# Altium PCB TX_Board.PcbDoc (part 4 of 5)
Units mm, origin at the board's own origin, x right, y up, seen from the top; angles counter-clockwise.
Board outline 69 x 69 mm, 4 copper layers (Top Layer, Int1 (GND), Int2 (GND), Bottom Layer), stack 1.591 mm thick; 102 components, 48 nets, 289 pads, 82 vias.
Unrouted connection lines stored in the file: 40.
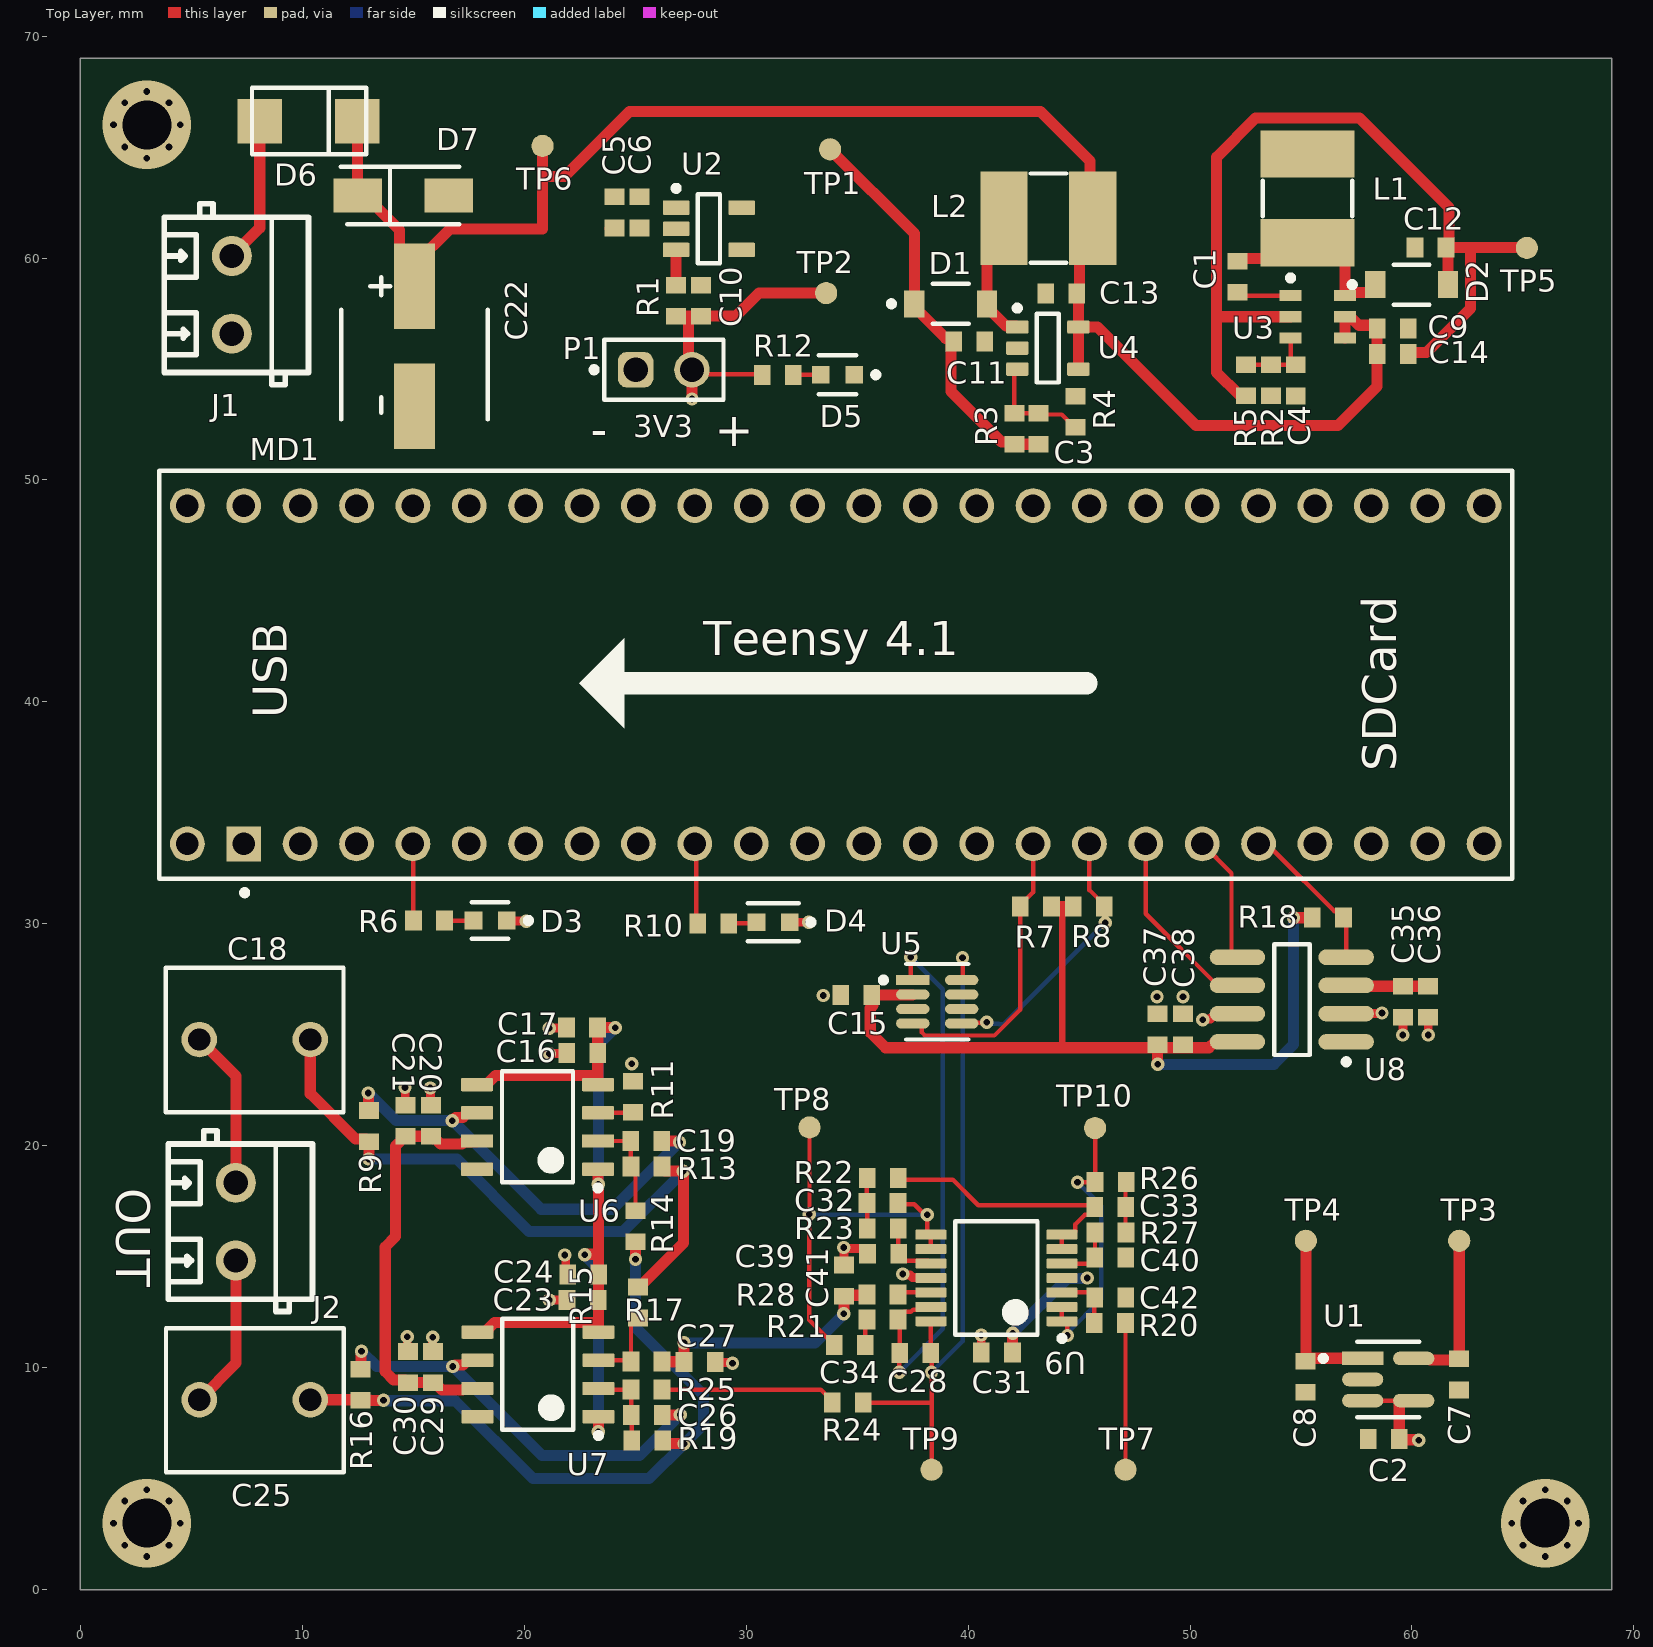
[diagram p0: Top Layer view]

## Part data (continued)
R17 R25: library part RT0603BRE072K49L, "100mW Thin Film Resistor 75V ±50ppm/℃ ±0.1% 2.49kΩ 0603 Chip Resistor - Surface Mount ROHS", Case Code (Metric)=0603, JLCPCB Part Number=C705842, Manufacturer="Yageo Group", Max Operating Temperature=155°C, Max Power Dissipation=100mW, Min Operating Temperature=-55°C, Temperature Coefficient=50ppm/°C, Tolerance=0.1%, Voltage Rating=75V, Voltage Rating (DC)=50V, Case/Package=0603, Category="Chip SMD Resistors", China RoHS=Non-Compliant, ComponentLink1Description=https://datasheet.octopart.com:443/RT0603BRE072K49L-Yageo-datasheet-176402239.pdf?src-supplier=Future+Electronics, ComponentLink1URL=https://datasheet.octopart.com:443/RT0603BRE072K49L-Yageo-datasheet-176402239.pdf?src-supplier=Future+Electronics, ComponentLink2Description=https://datasheet.octopart.com:443/RT0603BRE072K49L-Yageo-datasheet-169971040.pdf?src-supplier=Future+Electronics, ComponentLink2URL=https://datasheet.octopart.com:443/RT0603BRE072K49L-Yageo-datasheet-169971040.pdf?src-supplier=Future+Electronics, ComponentLink3Description=https://datasheet.octopart.com:443/RT0603BRE072K49L-Yageo-datasheet-166250672.pdf?src-supplier=Future+Electronics, ComponentLink3URL=https://datasheet.octopart.com:443/RT0603BRE072K49L-Yageo-datasheet-166250672.pdf?src-supplier=Future+Electronics, ComponentLink4Description=https://datasheet.octopart.com:443/RT0603BRE072K49L-Yageo-datasheet-136673517.pdf?src-supplier=Future+Electronics, ComponentLink4URL=https://datasheet.octopart.com:443/RT0603BRE072K49L-Yageo-datasheet-136673517.pdf?src-supplier=Future+Electronics, ComponentLink5Description=https://datasheet.octopart.com:443/RT0603BRE072K49L-Yageo-datasheet-137700930.pdf?src-supplier=Future+Electronics, ComponentLink5URL=https://datasheet.octopart.com:443/RT0603BRE072K49L-Yageo-datasheet-137700930.pdf?src-supplier=Future+Electronics, ComponentLink6Description=https://datasheet.octopart.com:443/RT0603BRE072K49L-Yageo-datasheet-41589729.pdf?src-supplier=Future+Electronics, ComponentLink6URL=https://datasheet.octopart.com:443/RT0603BRE072K49L-Yageo-datasheet-41589729.pdf?src-supplier=Future+Electronics, ComponentLink7Description=https://datasheet.octopart.com:443/RT0603BRE072K49L-Yageo-datasheet-12594463.pdf?src-supplier=Future+Electronics, ComponentLink7URL=https://datasheet.octopart.com:443/RT0603BRE072K49L-Yageo-datasheet-12594463.pdf?src-supplier=Future+Electronics, ComponentLink8Description=https://datasheet.octopart.com:443/RT0603BRE072K49L-Yageo-datasheet-10915759.pdf?src-supplier=Future+Electronics, ComponentLink8URL=https://datasheet.octopart.com:443/RT0603BRE072K49L-Yageo-datasheet-10915759.pdf?src-supplier=Future+Electronics, ComponentLink9Description=https://datasheet.octopart.com:443/RT0603BRE072K49L-Yageo-datasheet-34924148.pdf?src-supplier=Future+Electronics, ComponentLink9URL=https://datasheet.octopart.com:443/RT0603BRE072K49L-Yageo-datasheet-34924148.pdf?src-supplier=Future+Electronics, ComponentLink10Description=https://datasheet.octopart.com:443/RT0603BRE072K49L-Yageo-datasheet-96443642.pdf?src-supplier=Upverter, ComponentLink10URL=https://datasheet.octopart.com:443/RT0603BRE072K49L-Yageo-datasheet-96443642.pdf?src-supplier=Upverter, ComponentLink11Description=https://datasheet.octopart.com:443/RT0603BRE072K49L-Yageo-Group-datasheet-188167888.pdf?src-supplier=LCSC, ComponentLink11URL=https://datasheet.octopart.com:443/RT0603BRE072K49L-Yageo-Group-datasheet-188167888.pdf?src-supplier=LCSC, ComponentLink12Description=https://datasheet.octopart.com:443/RT0603BRE072K49L-Yageo-Group-datasheet-141265893.pdf?src-supplier=ODG+(Origin+Data+Global), ComponentLink12URL=https://datasheet.octopart.com:443/RT0603BRE072K49L-Yageo-Group-datasheet-141265893.pdf?src-supplier=ODG+(Origin+Data+Global), ComponentLink13Description=https://datasheet.octopart.com/RT0603BRE072K49L-Yageo-datasheet-86813807.pdf, ComponentLink13URL=https://datasheet.octopart.com/RT0603BRE072K49L-Yageo-datasheet-86813807.pdf, ComponentLink14Description=http://sigma.octopart.com:80/conflict_mineral_statement/Yageo-company-3.pdf?src-supplier=Compliance+Statements, ComponentLink14URL=http://sigma.octopart.com:80/conflict_mineral_statement/Yageo-company-3.pdf?src-supplier=Compliance+Statements, ComponentLink15Description=http://sigma.octopart.com:80/rohs_statement/Yageo-company-2.pdf?src-supplier=Compliance+Statements, ComponentLink15URL=http://sigma.octopart.com:80/rohs_statement/Yageo-company-2.pdf?src-supplier=Compliance+Statements, Composition="Thin Film", Contact Plating=Tin, Depth=800µm, Height=450µm, Lead Free="Lead Free", Length=1.6mm, Lifecycle Status=Production, Manufacturer Part Number=RT0603BRE072K49L, Military Standard=Not, Mounting Technology="Surface Mount", Number of Terminals=2, Number of Terminations=2, Packaging="Tape & Reel (TR)", Power Rating=100mW, Pricing="5000=0.0293 (USD)", Radiation Hardening=No, REACH SVHC=Unaffected, RoHS=Compliant, Schedule B="8533210045, 8533210045|8533210045|8533210045|8533210045|8533210045", Stock=5000, Supplier="Arrow Electronics", Supplier Part Number=RT0603BRE072K49L, Width=800µm, Working Voltage=75V
R18 R21 R28: library part RC0603FR-0710KL, "100mW Thick Film Resistors ±100ppm/℃ ±1% 10kΩ 0603 Chip Resistor - Surface Mount ROHS", Case Code (Imperial)=0603, JLCPCB Part Number=C98220, Manufacturer="Yageo Group", Max Operating Temperature=155°C, Min Operating Temperature=-55°C, Power Rating=100mW, Temperature Coefficient=100ppm/°C, Tolerance=1%, Voltage Rating=75V, Voltage Rating (DC)=50V, Case Code (Metric)=0603, Case/Package=0603, Category="Chip SMD Resistors", China RoHS=Non-Compliant, ComponentLink1Description=https://datasheet.octopart.com:443/RC0603FR-0710KL-Yageo-datasheet-175887523.pdf?src-supplier=IHS, ComponentLink1URL=https://datasheet.octopart.com:443/RC0603FR-0710KL-Yageo-datasheet-175887523.pdf?src-supplier=IHS, ComponentLink2Description=https://datasheet.octopart.com:443/RC0603FR-0710KL-Yageo-datasheet-103092701.pdf?src-supplier=Upverter, ComponentLink2URL=https://datasheet.octopart.com:443/RC0603FR-0710KL-Yageo-datasheet-103092701.pdf?src-supplier=Upverter, ComponentLink3Description=https://datasheet.octopart.com:443/RC0603FR-0710KL-Yageo-datasheet-98239111.pdf?src-supplier=Upverter, ComponentLink3URL=https://datasheet.octopart.com:443/RC0603FR-0710KL-Yageo-datasheet-98239111.pdf?src-supplier=Upverter, ComponentLink4Description=https://datasheet.octopart.com:443/RC0603FR-0710KL-Yageo-datasheet-141265859.pdf?src-supplier=Upverter, ComponentLink4URL=https://datasheet.octopart.com:443/RC0603FR-0710KL-Yageo-datasheet-141265859.pdf?src-supplier=Upverter, ComponentLink5Description=https://sigma.octopart.com:443/138820526/technical_drawing/Yageo-RC0603FR-0710KL.pdf?src-supplier=Upverter, ComponentLink5URL=https://sigma.octopart.com:443/138820526/technical_drawing/Yageo-RC0603FR-0710KL.pdf?src-supplier=Upverter, ComponentLink6Description=https://datasheet.octopart.com:443/RC0603FR-0710KL-Yageo-datasheet-8328172.pdf?src-supplier=Farnell, ComponentLink6URL=https://datasheet.octopart.com:443/RC0603FR-0710KL-Yageo-datasheet-8328172.pdf?src-supplier=Farnell, ComponentLink7Description=https://datasheet.octopart.com:443/RC0603FR-0710KL-Yageo-datasheet-13691069.pdf?src-supplier=Farnell, ComponentLink7URL=https://datasheet.octopart.com:443/RC0603FR-0710KL-Yageo-datasheet-13691069.pdf?src-supplier=Farnell, ComponentLink8Description=https://datasheet.octopart.com:443/RC0603FR-0710KL-Yageo-datasheet-62067350.pdf?src-supplier=element14+APAC, ComponentLink8URL=https://datasheet.octopart.com:443/RC0603FR-0710KL-Yageo-datasheet-62067350.pdf?src-supplier=element14+APAC, ComponentLink9Description=https://datasheet.octopart.com:443/RC0603FR-0710KL-Yageo-datasheet-17842380.pdf?src-supplier=element14+APAC, ComponentLink9URL=https://datasheet.octopart.com:443/RC0603FR-0710KL-Yageo-datasheet-17842380.pdf?src-supplier=element14+APAC, ComponentLink10Description=https://datasheet.octopart.com:443/RC0603FR-0710KL-Yageo-datasheet-15599030.pdf?src-supplier=Future+Electronics, ComponentLink10URL=https://datasheet.octopart.com:443/RC0603FR-0710KL-Yageo-datasheet-15599030.pdf?src-supplier=Future+Electronics, ComponentLink11Description=https://datasheet.octopart.com:443/RC0603FR-0710KL-Yageo-Group-datasheet-176638170.pdf?src-supplier=Future+Electronics, ComponentLink11URL=https://datasheet.octopart.com:443/RC0603FR-0710KL-Yageo-Group-datasheet-176638170.pdf?src-supplier=Future+Electronics, ComponentLink12Description=https://datasheet.octopart.com:443/RC0603FR-0710KL-Yageo-datasheet-164759695.pdf?src-supplier=Future+Electronics, ComponentLink12URL=https://datasheet.octopart.com:443/RC0603FR-0710KL-Yageo-datasheet-164759695.pdf?src-supplier=Future+Electronics, ComponentLink13Description=https://datasheet.octopart.com:443/RC0603FR-0710KL-Yageo-datasheet-127823281.pdf?src-supplier=Future+Electronics, ComponentLink13URL=https://datasheet.octopart.com:443/RC0603FR-0710KL-Yageo-datasheet-127823281.pdf?src-supplier=Future+Electronics, ComponentLink14Description=https://datasheet.octopart.com:443/RC0603FR-0710KL-Yageo-datasheet-137700087.pdf?src-supplier=Future+Electronics, ComponentLink14URL=https://datasheet.octopart.com:443/RC0603FR-0710KL-Yageo-datasheet-137700087.pdf?src-supplier=Future+Electronics, ComponentLink15Description=https://datasheet.octopart.com:443/RC0603FR-0710KL-Yageo-datasheet-27584510.pdf?src-supplier=Future+Electronics, ComponentLink15URL=https://datasheet.octopart.com:443/RC0603FR-0710KL-Yageo-datasheet-27584510.pdf?src-supplier=Future+Electronics, ComponentLink16Description=https://datasheet.octopart.com:443/RC0603FR-0710KL-Yageo-datasheet-8324193.pdf?src-supplier=Future+Electronics, ComponentLink16URL=https://datasheet.octopart.com:443/RC0603FR-0710KL-Yageo-datasheet-8324193.pdf?src-supplier=Future+Electronics, ComponentLink17Description=https://datasheet.octopart.com:443/RC0603FR-0710KL-Yageo-datasheet-12596169.pdf?src-supplier=Newark, ComponentLink17URL=https://datasheet.octopart.com:443/RC0603FR-0710KL-Yageo-datasheet-12596169.pdf?src-supplier=Newark, ComponentLink18Description=https://datasheet.octopart.com:443/RC0603FR-0710KL-Yageo-datasheet-503470.pdf?src-supplier=Newark, ComponentLink18URL=https://datasheet.octopart.com:443/RC0603FR-0710KL-Yageo-datasheet-503470.pdf?src-supplier=Newark, ComponentLink19Description=https://datasheet.octopart.com:443/RC0603FR-0710KL-Yageo-datasheet-34211833.pdf?src-supplier=Newark, ComponentLink19URL=https://datasheet.octopart.com:443/RC0603FR-0710KL-Yageo-datasheet-34211833.pdf?src-supplier=Newark, ComponentLink20Description=https://datasheet.octopart.com:443/RC0603FR-0710KL-Yageo-Group-datasheet-189192902.pdf?src-supplier=LCSC, ComponentLink20URL=https://datasheet.octopart.com:443/RC0603FR-0710KL-Yageo-Group-datasheet-189192902.pdf?src-supplier=LCSC, ComponentLink21Description=https://datasheet.octopart.com:443/RC0603FR-0710KL-Yageo-datasheet-79472498.pdf?src-supplier=Megastar, ComponentLink21URL=https://datasheet.octopart.com:443/RC0603FR-0710KL-Yageo-datasheet-79472498.pdf?src-supplier=Megastar, ComponentLink22Description=https://datasheet.octopart.com/RC0603FR-0710KL-Yageo-datasheet-73766026.pdf, ComponentLink22URL=https://datasheet.octopart.com/RC0603FR-0710KL-Yageo-datasheet-73766026.pdf, ComponentLink23Description=https://datasheet.octopart.com:443/RC0603FR-0710KL-Yageo-datasheet-118562.pdf?src-supplier=DigiKey, ComponentLink23URL=https://datasheet.octopart.com:443/RC0603FR-0710KL-Yageo-datasheet-118562.pdf?src-supplier=DigiKey, ComponentLink24Description=http://sigma.octopart.com:80/conflict_mineral_statement/Yageo-company-3.pdf?src-supplier=Compliance+Statements, ComponentLink24URL=http://sigma.octopart.com:80/conflict_mineral_statement/Yageo-company-3.pdf?src-supplier=Compliance+Statements, ComponentLink25Description=http://sigma.octopart.com:80/rohs_statement/Yageo-company-2.pdf?src-supplier=Compliance+Statements, ComponentLink25URL=http://sigma.octopart.com:80/rohs_statement/Yageo-company-2.pdf?src-supplier=Compliance+Statements, Composition="Thick Film", Contact Plating=Tin, Depth=800µm, Height=450µm, Lead Free="Lead Free", Lead Pitch=300µm, Length=1.6mm, Lifecycle Status=Production, Manufacturer Part Number=RC0603FR-0710KL, Military Standard=Not, Mounting Technology="Surface Mount", Number of Terminals=2, Packaging="Tape & Reel", Pins=2, Pricing="5000=0.004, 15000=0.003, 25000=0.002 (USD)", Radiation Hardening=No, REACH SVHC=Unaffected, RoHS=Compliant, Schedule B="8533210045, 8533210045|8533210045|8533210045|8533210045|8533210045|8533210045|8533210045|8533210045|8533210045|8533210045|8533210045|8533210045|8533210045|8533210045|8533210045|8533210045|8533210045|8533210045|8533210045|8533210045|8533210045|8533210045|8533210045|85", Stock=9318000, Supplier=Newark, Supplier Part Number=RC0603FR-0710KL, Termination=SMD/SMT, Weight=2.012816mg, Width=800µm, Working Voltage=75V
R22: library part RC0603FR-071K2L, "100mW Thick Film Resistors 75V ±100ppm/℃ ±1% 1.2kΩ 0603 Chip Resistor - Surface Mount ROHS", Case Code (Imperial)=0603, Case Code (Metric)=1608, JLCPCB Part Number=C114605, Manufacturer="Yageo Group", Max Operating Temperature=155°C, Min Operating Temperature=-55°C, Power Rating=100mW, Temperature Coefficient=100ppm/°C, Tolerance=1%, Voltage Rating=50V, Working Voltage=75V, Case/Package=0603, Category="Chip SMD Resistors", China RoHS=Non-Compliant, ComponentLink1Description=https://datasheet.octopart.com:443/RC0603FR-071K2L-Yageo-datasheet-175887523.pdf?src-supplier=IHS, ComponentLink1URL=https://datasheet.octopart.com:443/RC0603FR-071K2L-Yageo-datasheet-175887523.pdf?src-supplier=IHS, ComponentLink2Description=https://datasheet.octopart.com:443/RC0603FR-071K2L-Yageo-datasheet-62067350.pdf?src-supplier=element14+APAC, ComponentLink2URL=https://datasheet.octopart.com:443/RC0603FR-071K2L-Yageo-datasheet-62067350.pdf?src-supplier=element14+APAC, ComponentLink3Description=https://datasheet.octopart.com:443/RC0603FR-071K2L-Yageo-datasheet-103092701.pdf?src-supplier=Upverter, ComponentLink3URL=https://datasheet.octopart.com:443/RC0603FR-071K2L-Yageo-datasheet-103092701.pdf?src-supplier=Upverter, ComponentLink4Description=https://datasheet.octopart.com:443/RC0603FR-071K2L-Yageo-datasheet-98239111.pdf?src-supplier=Upverter, ComponentLink4URL=https://datasheet.octopart.com:443/RC0603FR-071K2L-Yageo-datasheet-98239111.pdf?src-supplier=Upverter, ComponentLink5Description=https://datasheet.octopart.com:443/RC0603FR-071K2L-Yageo-datasheet-8328172.pdf?src-supplier=Newark, ComponentLink5URL=https://datasheet.octopart.com:443/RC0603FR-071K2L-Yageo-datasheet-8328172.pdf?src-supplier=Newark, ComponentLink6Description=https://datasheet.octopart.com:443/RC0603FR-071K2L-Yageo-Group-datasheet-190305687.pdf?src-supplier=Newark, ComponentLink6URL=https://datasheet.octopart.com:443/RC0603FR-071K2L-Yageo-Group-datasheet-190305687.pdf?src-supplier=Newark, ComponentLink7Description=https://datasheet.octopart.com:443/RC0603FR-071K2L-Yageo-datasheet-34211833.pdf?src-supplier=Newark, ComponentLink7URL=https://datasheet.octopart.com:443/RC0603FR-071K2L-Yageo-datasheet-34211833.pdf?src-supplier=Newark, ComponentLink8Description=https://datasheet.octopart.com:443/RC0603FR-071K2L-Yageo-Group-datasheet-189192902.pdf?src-supplier=LCSC, ComponentLink8URL=https://datasheet.octopart.com:443/RC0603FR-071K2L-Yageo-Group-datasheet-189192902.pdf?src-supplier=LCSC, ComponentLink9Description=https://datasheet.octopart.com:443/RC0603FR-071K2L-Yageo-Group-datasheet-176638170.pdf?src-supplier=Future+Electronics, ComponentLink9URL=https://datasheet.octopart.com:443/RC0603FR-071K2L-Yageo-Group-datasheet-176638170.pdf?src-supplier=Future+Electronics, ComponentLink10Description=https://datasheet.octopart.com:443/RC0603FR-071K2L-Yageo-datasheet-164759695.pdf?src-supplier=Future+Electronics, ComponentLink10URL=https://datasheet.octopart.com:443/RC0603FR-071K2L-Yageo-datasheet-164759695.pdf?src-supplier=Future+Electronics, ComponentLink11Description=https://datasheet.octopart.com:443/RC0603FR-071K2L-Yageo-datasheet-137700087.pdf?src-supplier=Future+Electronics, ComponentLink11URL=https://datasheet.octopart.com:443/RC0603FR-071K2L-Yageo-datasheet-137700087.pdf?src-supplier=Future+Electronics, ComponentLink12Description=https://datasheet.octopart.com:443/RC0603FR-071K2L-Yageo-datasheet-27584510.pdf?src-supplier=Future+Electronics, ComponentLink12URL=https://datasheet.octopart.com:443/RC0603FR-071K2L-Yageo-datasheet-27584510.pdf?src-supplier=Future+Electronics, ComponentLink13Description=https://datasheet.octopart.com:443/RC0603FR-071K2L-Yageo-datasheet-15599030.pdf?src-supplier=Future+Electronics, ComponentLink13URL=https://datasheet.octopart.com:443/RC0603FR-071K2L-Yageo-datasheet-15599030.pdf?src-supplier=Future+Electronics, ComponentLink14Description=https://datasheet.octopart.com:443/RC0603FR-071K2L-Yageo-datasheet-12596169.pdf?src-supplier=Future+Electronics, ComponentLink14URL=https://datasheet.octopart.com:443/RC0603FR-071K2L-Yageo-datasheet-12596169.pdf?src-supplier=Future+Electronics, ComponentLink15Description=https://datasheet.octopart.com:443/RC0603FR-071K2L-Yageo-datasheet-8324193.pdf?src-supplier=Future+Electronics, ComponentLink15URL=https://datasheet.octopart.com:443/RC0603FR-071K2L-Yageo-datasheet-8324193.pdf?src-supplier=Future+Electronics, ComponentLink16Description=https://datasheet.octopart.com/RC0603FR-071K2L-Yageo-datasheet-73766026.pdf, ComponentLink16URL=https://datasheet.octopart.com/RC0603FR-071K2L-Yageo-datasheet-73766026.pdf, ComponentLink17Description=https://datasheet.octopart.com:443/RC0603FR-071K2L-Yageo-datasheet-30459151.pdf?src-supplier=Seeed+Studio, ComponentLink17URL=https://datasheet.octopart.com:443/RC0603FR-071K2L-Yageo-datasheet-30459151.pdf?src-supplier=Seeed+Studio, ComponentLink18Description=https://datasheet.octopart.com:443/RC0603FR-071K2L-Yageo-datasheet-118562.pdf?src-supplier=DigiKey, ComponentLink18URL=https://datasheet.octopart.com:443/RC0603FR-071K2L-Yageo-datasheet-118562.pdf?src-supplier=DigiKey, ComponentLink19Description=http://sigma.octopart.com:80/conflict_mineral_statement/Yageo-company-3.pdf?src-supplier=Compliance+Statements, ComponentLink19URL=http://sigma.octopart.com:80/conflict_mineral_statement/Yageo-company-3.pdf?src-supplier=Compliance+Statements, ComponentLink20Description=http://sigma.octopart.com:80/rohs_statement/Yageo-company-2.pdf?src-supplier=Compliance+Statements, ComponentLink20URL=http://sigma.octopart.com:80/rohs_statement/Yageo-company-2.pdf?src-supplier=Compliance+Statements, Composition="Thick Film", Depth=800µm, Height=450µm, Lead Free="Lead Free", Length=1.6mm, Lifecycle Status=Production, Manufacturer Part Number=RC0603FR-071K2L, Military Standard=Not, Mounting Technology="Surface Mount", Number of Terminals=2, Packaging="Tape and Reel", Pins=2, Pricing="5000=0.00165, 10000=0.00161, 20000=0.00156, 40000=0.00152, 80000=0.00148 (USD)", REACH SVHC=Unaffected, RoHS=Compliant, Schedule B="8533210045, 8533210045|8533210045, 8533210045|8533210045|8533210045, 8533210045|8533210045|8533210045|8533210045", Stock=95000, Supplier=Avnet, Supplier Part Number=RC0603FR-071K2L, Termination=SMD/SMT, Voltage Rating (AC)=50V, Voltage Rating (DC)=50V, Width=800µm
R26: library part RC0603FR-07820RL, "100Mw Thick Film Resistors 100Ppm/ 1% 820 0603 Chip Resistor Surface Mount Rohs", Case Code (Imperial)=0603, Case Code (Metric)=1608, JLCPCB Part Number=C114638, Manufacturer="Yageo Group", Max Operating Temperature=155°C, Min Operating Temperature=-55°C, Power Rating=100mW, Temperature Coefficient=100ppm/°C, Tolerance=1%, Voltage Rating=50V, Working Voltage=75V, Case/Package=0603, Category="Chip SMD Resistors", China RoHS=Non-Compliant, ComponentLink1Description=https://datasheet.octopart.com:443/RC0603FR-07820RL-Yageo-datasheet-175887523.pdf?src-supplier=Farnell, ComponentLink1URL=https://datasheet.octopart.com:443/RC0603FR-07820RL-Yageo-datasheet-175887523.pdf?src-supplier=Farnell, ComponentLink2Description=https://datasheet.octopart.com:443/RC0603FR-07820RL-Yageo-datasheet-34211833.pdf?src-supplier=Farnell, ComponentLink2URL=https://datasheet.octopart.com:443/RC0603FR-07820RL-Yageo-datasheet-34211833.pdf?src-supplier=Farnell, ComponentLink3Description=https://datasheet.octopart.com:443/RC0603FR-07820RL-Yageo-datasheet-103092701.pdf?src-supplier=Upverter, ComponentLink3URL=https://datasheet.octopart.com:443/RC0603FR-07820RL-Yageo-datasheet-103092701.pdf?src-supplier=Upverter, ComponentLink4Description=https://datasheet.octopart.com:443/RC0603FR-07820RL-Yageo-datasheet-98239111.pdf?src-supplier=Upverter, ComponentLink4URL=https://datasheet.octopart.com:443/RC0603FR-07820RL-Yageo-datasheet-98239111.pdf?src-supplier=Upverter, ComponentLink5Description=https://datasheet.octopart.com:443/RC0603FR-07820RL-Yageo-Group-datasheet-190305687.pdf?src-supplier=Future+Electronics, ComponentLink5URL=https://datasheet.octopart.com:443/RC0603FR-07820RL-Yageo-Group-datasheet-190305687.pdf?src-supplier=Future+Electronics, ComponentLink6Description=https://datasheet.octopart.com:443/RC0603FR-07820RL-Yageo-datasheet-164759695.pdf?src-supplier=Future+Electronics, ComponentLink6URL=https://datasheet.octopart.com:443/RC0603FR-07820RL-Yageo-datasheet-164759695.pdf?src-supplier=Future+Electronics, ComponentLink7Description=https://datasheet.octopart.com:443/RC0603FR-07820RL-Yageo-datasheet-137700087.pdf?src-supplier=Future+Electronics, ComponentLink7URL=https://datasheet.octopart.com:443/RC0603FR-07820RL-Yageo-datasheet-137700087.pdf?src-supplier=Future+Electronics, ComponentLink8Description=https://datasheet.octopart.com:443/RC0603FR-07820RL-Yageo-datasheet-27584510.pdf?src-supplier=Future+Electronics, ComponentLink8URL=https://datasheet.octopart.com:443/RC0603FR-07820RL-Yageo-datasheet-27584510.pdf?src-supplier=Future+Electronics, ComponentLink9Description=https://datasheet.octopart.com:443/RC0603FR-07820RL-Yageo-datasheet-15599030.pdf?src-supplier=Future+Electronics, ComponentLink9URL=https://datasheet.octopart.com:443/RC0603FR-07820RL-Yageo-datasheet-15599030.pdf?src-supplier=Future+Electronics, ComponentLink10Description=https://datasheet.octopart.com:443/RC0603FR-07820RL-Yageo-datasheet-12596169.pdf?src-supplier=Future+Electronics, ComponentLink10URL=https://datasheet.octopart.com:443/RC0603FR-07820RL-Yageo-datasheet-12596169.pdf?src-supplier=Future+Electronics, ComponentLink11Description=https://datasheet.octopart.com:443/RC0603FR-07820RL-Yageo-datasheet-503470.pdf?src-supplier=Future+Electronics, ComponentLink11URL=https://datasheet.octopart.com:443/RC0603FR-07820RL-Yageo-datasheet-503470.pdf?src-supplier=Future+Electronics, ComponentLink12Description=https://datasheet.octopart.com:443/RC0603FR-07820RL-Yageo-datasheet-8328172.pdf?src-supplier=Newark, ComponentLink12URL=https://datasheet.octopart.com:443/RC0603FR-07820RL-Yageo-datasheet-8328172.pdf?src-supplier=Newark, ComponentLink13Description=https://datasheet.octopart.com:443/RC0603FR-07820RL-Yageo-datasheet-62067350.pdf?src-supplier=Newark, ComponentLink13URL=https://datasheet.octopart.com:443/RC0603FR-07820RL-Yageo-datasheet-62067350.pdf?src-supplier=Newark, ComponentLink14Description=https://datasheet.octopart.com:443/RC0603FR-07820RL-Yageo-Group-datasheet-189192902.pdf?src-supplier=LCSC, ComponentLink14URL=https://datasheet.octopart.com:443/RC0603FR-07820RL-Yageo-Group-datasheet-189192902.pdf?src-supplier=LCSC, ComponentLink15Description=https://datasheet.octopart.com/RC0603FR-07820RL-Yageo-datasheet-73766026.pdf, ComponentLink15URL=https://datasheet.octopart.com/RC0603FR-07820RL-Yageo-datasheet-73766026.pdf, ComponentLink16Description=https://datasheet.octopart.com:443/RC0603FR-07820RL-Yageo-datasheet-118562.pdf?src-supplier=DigiKey, ComponentLink16URL=https://datasheet.octopart.com:443/RC0603FR-07820RL-Yageo-datasheet-118562.pdf?src-supplier=DigiKey, ComponentLink17Description=http://sigma.octopart.com:80/conflict_mineral_statement/Yageo-company-3.pdf?src-supplier=Compliance+Statements, ComponentLink17URL=http://sigma.octopart.com:80/conflict_mineral_statement/Yageo-company-3.pdf?src-supplier=Compliance+Statements, ComponentLink18Description=http://sigma.octopart.com:80/rohs_statement/Yageo-company-2.pdf?src-supplier=Compliance+Statements, ComponentLink18URL=http://sigma.octopart.com:80/rohs_statement/Yageo-company-2.pdf?src-supplier=Compliance+Statements, Composition="Thick Film", Country of Origin="Mainland China, Taiwan", Depth=800µm, Export Control Classification Number (ECCN) Code=EAR99, Harmonized Tariff Schedule (HTS) Code=8533.21.00.30, Height=450µm, Introduction Date=2004-09-22, Lead Free="Lead Free", Length=1.6mm, Lifecycle Status=Production, Manufacturer Part Number=RC0603FR-07820RL, Military Standard=Not, Mounting Technology="Surface Mount", Number of Terminals=2, Packaging="Tape and Reel", Pins=2, Pricing="5000=0.00165, 10000=0.00161, 20000=0.00156, 40000=0.00154, 80000=0.00154 (USD)", REACH SVHC=Unaffected, RoHS=Compliant, Schedule B="8533210045, 8533210045|8533210045, 8533210045|8533210045|8533210045, 8533210045|8533210045|8533210045|8533210045", Stock=100000, Supplier=Avnet, Supplier Part Number=RC0603FR-07820RL, Termination=SMD/SMT, Voltage Rating (AC)=50V, Voltage Rating (DC)=50V, Weight=2.012816mg, Width=800µm
R27: library part RC0603FR-0727KL, "100mW Thick Film Resistors 75V ±100ppm/℃ ±1% 27kΩ 0603 Chip Resistor - Surface Mount ROHS", Case Code (Imperial)=0603, JLCPCB Part Number=C114614, Manufacturer="Yageo Group", Max Operating Temperature=155°C, Max Power Dissipation=100mW, Min Operating Temperature=-55°C, Temperature Coefficient=100ppm/°C, Tolerance=1%, Voltage Rating=75V, Voltage Rating (AC)=50V, Case/Package=0603, Category="Chip SMD Resistors", China RoHS=Non-Compliant, ComponentLink1Description=https://datasheet.octopart.com:443/RC0603FR-0727KL-Yageo-datasheet-175887523.pdf?src-supplier=IHS, ComponentLink1URL=https://datasheet.octopart.com:443/RC0603FR-0727KL-Yageo-datasheet-175887523.pdf?src-supplier=IHS, ComponentLink2Description=https://datasheet.octopart.com:443/RC0603FR-0727KL-Yageo-datasheet-103092701.pdf?src-supplier=Upverter, ComponentLink2URL=https://datasheet.octopart.com:443/RC0603FR-0727KL-Yageo-datasheet-103092701.pdf?src-supplier=Upverter, ComponentLink3Description=https://datasheet.octopart.com:443/RC0603FR-0727KL-Yageo-datasheet-8328172.pdf?src-supplier=Newark, ComponentLink3URL=https://datasheet.octopart.com:443/RC0603FR-0727KL-Yageo-datasheet-8328172.pdf?src-supplier=Newark, ComponentLink4Description=https://datasheet.octopart.com:443/RC0603FR-0727KL-Yageo-datasheet-34211833.pdf?src-supplier=Newark, ComponentLink4URL=https://datasheet.octopart.com:443/RC0603FR-0727KL-Yageo-datasheet-34211833.pdf?src-supplier=Newark, ComponentLink5Description=https://datasheet.octopart.com:443/RC0603FR-0727KL-Yageo-Group-datasheet-190305687.pdf?src-supplier=Future+Electronics, ComponentLink5URL=https://datasheet.octopart.com:443/RC0603FR-0727KL-Yageo-Group-datasheet-190305687.pdf?src-supplier=Future+Electronics, ComponentLink6Description=https://datasheet.octopart.com:443/RC0603FR-0727KL-Yageo-datasheet-164759695.pdf?src-supplier=Future+Electronics, ComponentLink6URL=https://datasheet.octopart.com:443/RC0603FR-0727KL-Yageo-datasheet-164759695.pdf?src-supplier=Future+Electronics, ComponentLink7Description=https://datasheet.octopart.com:443/RC0603FR-0727KL-Yageo-datasheet-137700087.pdf?src-supplier=Future+Electronics, ComponentLink7URL=https://datasheet.octopart.com:443/RC0603FR-0727KL-Yageo-datasheet-137700087.pdf?src-supplier=Future+Electronics, ComponentLink8Description=https://datasheet.octopart.com:443/RC0603FR-0727KL-Yageo-datasheet-27584510.pdf?src-supplier=Future+Electronics, ComponentLink8URL=https://datasheet.octopart.com:443/RC0603FR-0727KL-Yageo-datasheet-27584510.pdf?src-supplier=Future+Electronics, ComponentLink9Description=https://datasheet.octopart.com:443/RC0603FR-0727KL-Yageo-datasheet-15599030.pdf?src-supplier=Future+Electronics, ComponentLink9URL=https://datasheet.octopart.com:443/RC0603FR-0727KL-Yageo-datasheet-15599030.pdf?src-supplier=Future+Electronics, ComponentLink10Description=https://datasheet.octopart.com:443/RC0603FR-0727KL-Yageo-datasheet-12596169.pdf?src-supplier=Future+Electronics, ComponentLink10URL=https://datasheet.octopart.com:443/RC0603FR-0727KL-Yageo-datasheet-12596169.pdf?src-supplier=Future+Electronics, ComponentLink11Description=https://datasheet.octopart.com:443/RC0603FR-0727KL-Yageo-datasheet-8324193.pdf?src-supplier=Future+Electronics, ComponentLink11URL=https://datasheet.octopart.com:443/RC0603FR-0727KL-Yageo-datasheet-8324193.pdf?src-supplier=Future+Electronics, ComponentLink12Description=https://datasheet.octopart.com:443/RC0603FR-0727KL-Yageo-datasheet-62067350.pdf?src-supplier=element14+APAC, ComponentLink12URL=https://datasheet.octopart.com:443/RC0603FR-0727KL-Yageo-datasheet-62067350.pdf?src-supplier=element14+APAC, ComponentLink13Description=https://datasheet.octopart.com/RC0603FR-0727KL-Yageo-datasheet-73766026.pdf, ComponentLink13URL=https://datasheet.octopart.com/RC0603FR-0727KL-Yageo-datasheet-73766026.pdf, ComponentLink14Description=https://datasheet.octopart.com:443/RC0603FR-0727KL-Yageo-datasheet-118562.pdf?src-supplier=DigiKey, ComponentLink14URL=https://datasheet.octopart.com:443/RC0603FR-0727KL-Yageo-datasheet-118562.pdf?src-supplier=DigiKey, ComponentLink15Description=http://sigma.octopart.com:80/conflict_mineral_statement/Yageo-company-3.pdf?src-supplier=Compliance+Statements, ComponentLink15URL=http://sigma.octopart.com:80/conflict_mineral_statement/Yageo-company-3.pdf?src-supplier=Compliance+Statements, ComponentLink16Description=http://sigma.octopart.com:80/rohs_statement/Yageo-company-2.pdf?src-supplier=Compliance+Statements, ComponentLink16URL=http://sigma.octopart.com:80/rohs_statement/Yageo-company-2.pdf?src-supplier=Compliance+Statements, Composition="Thick Film", Country of Origin="Mainland China, Taiwan", Depth=800µm, Export Control Classification Number (ECCN) Code=EAR99, Features="Moisture Resistant", Harmonized Tariff Schedule (HTS) Code=8533.21.00.30, Height=450µm, Introduction Date=2008-07-18, Lead Free="Lead Free", Length=1.6mm, Lifecycle Status=Production, Manufacturer Part Number=RC0603FR-0727KL, Military Standard=Not, Mounting Technology="Surface Mount", Number of Terminals=2, Number of Terminations=2, Packaging="Tape & Reel", Pins=2, Power Rating=100mW, Pricing="5000=0.00165, 10000=0.00161, 20000=0.00156, 40000=0.00153, 80000=0.00152 (USD)", REACH SVHC=Unaffected, RoHS=Compliant, Schedule B="8533210045, 8533210045|8533210045|8533210045|8533210045|8533210045|8533210045|8533210045|8533210045|8533210045|8533210045|8533210045|8533210045|8533210045|8533210045|8533210045, 8533210045|8533210045|8533210045|8533210045|8533210045|8533210045|8533210045|8533210045|8533210045|8533210045|8533210045|8533210045|8533210045|8533210045|8533210045|8533210045|8533210045|8533210045|8533210045|8533210045|8533210045|8533210045|8533210045|85", Stock=75000, Supplier=Avnet, Supplier Part Number=RC0603FR-0727KL, Termination=SMD/SMT, Voltage Rating (DC)=50V, Width=800µm, Working Voltage=75V
U1: library part CMP-04916-000032-1, "IC VREF SERIES 0.05% SOT23-5", Case/Package=SOT-23-5, JLCPCB Part Number=C528704, Max Operating Temperature=125°C, Min Operating Temperature=-40°C, Min Output Voltage=3V, Operating Supply Current=460uA, Output Current=20mA, Quiescent Current=360uA, Temperature Coefficient=8ppm/°C, Tolerance=0.05%, Lead Free="Lead Free", Mount="Surface Mount", Output Type=Fixed, Packaging="Tape and Reel", Reference Type=Series, RoHS Compliant=Yes
U2: library part CMP-0394-00651-2, "Single Output LDO, 150 mA, Fixed 3.3 V Output, 2.5 to 24 V Input, with Ultra-Low IQ, 5-pin SOT-23 (DBV), -40 to 125 degC, Green (RoHS & no Sb/Br)", JLCPCB Part Number=C94917, Manufacturer="Texas Instruments", Accuracy(%)=2, Code_JEDEC=MO-178, ComponentLink1Description="Manufacturer URL", ComponentLink1URL=http://www.ti.com/, ComponentLink2Description=Datasheet, ComponentLink2URL=http://www.ti.com/general/docs/lit/getliterature.tsp?genericPartNumber=TLV70433&fileType=pdf, ComponentLink3Description="Package Specification", ComponentLink3URL=http://www.ti.com/litv/pdf/mpds018i, DatasheetVersion=SBVS148C, Eco-Plan="Green (RoHS & no Sb/Br)", Fixed Output Options(V)=3.3, Iout(Max)(A)=0.15, Iq(Typ)(mA)=0.003, Mounting Technology="Surface Mount", PackageDescription="5-Pin Plastic Small Outline, Body 1.60 Ãƒâ€” 2.90 mm, Pitch 0.95 mm", PackageReference=DBV0005A, PackageVersion=4073253-4/K, PartNumber=TLV70433DBVR, SubFamily="Single Channel LDO", Vdo(Typ)(mV)=400, Vin(Max)(V)=24, Vin(Min)(V)=2.5, Vout Adj(Max)(V)=3.3, Vout Adj(Min)(V)=3.3
U3: library part LMR16006YDDCR, "SIMPLE SWITCHER® 4V to 60V, 600mA Step-Down Regulator with Low Iq 6-SOT-23-THIN -40 to 125", Case/Package=SOT-23-6, JLCPCB Part Number=C290195, Manufacturer="Texas Instruments", Manufacturer Lifecycle Status=ACTIVE, Max Junction Temperature (Tj)=150°C, Max Operating Temperature=125°C, Max Output current=600mA, Max Output Voltage=55V, Max Supply Voltage=60V, Min Input Voltage=4V, Min Operating Temperature=-40°C, Min Output Voltage=765mV, Quiescent Current=28µA, Supplier Part Number=296-40294-2-ND, Switching Frequency=2.1MHz, Category="Voltage Regulators - Switching", ComponentLink1Description=https://sigma.octopart.com:443/180581133/technical_drawing/Texas-Instruments-LMR16006YDDCR.pdf?src-supplier=Texas+Instruments, ComponentLink1URL=https://sigma.octopart.com:443/180581133/technical_drawing/Texas-Instruments-LMR16006YDDCR.pdf?src-supplier=Texas+Instruments, ComponentLink2Description=https://octopart.com:443/opatz8j6/c1?t=_z8rtzIolJWlWpORxEUbgq8yRtybU2-j-A22s777csaonrBf9a0Ei1Pg8feyJ6PO_xR0kAJk6VKJC7jE-R56C_bAfQE65DMspcsIoPRFy1UnovbgYkjc-gzeBbFdDIzTbw9hj8lnAEsu6sZm9Uxo145Q7uBwImA2K6uQ4kjxgkGf7uie03ZBjno0JpIpZJ5Ix8VnhagTvAdJTUU-PnEoYJhWM6yHNDkscUsHrvmXxOerB0wgIdyekSIOAmam8R9CN_NhBwFqTse8fURzdGHqDzzg4sZZH5qAKBLFLIUS3K8U13np4U5M1dR2EvzEQmfniCz1ppi3vVEUWpNaQFju6X7L1fOOOgh6_f5UuAt79sDHNqni0UENSJ0quPU0dfvdqvhhBxaJ&src-supplier=Texas+Instruments, ComponentLink2URL=https://octopart.com:443/opatz8j6/c1?t=_z8rtzIolJWlWpORxEUbgq8yRtybU2-j-A22s777csaonrBf9a0Ei1Pg8feyJ6PO_xR0kAJk6VKJC7jE-R56C_bAfQE65DMspcsIoPRFy1UnovbgYkjc-gzeBbFdDIzTbw9hj8lnAEsu6sZm9Uxo145Q7uBwImA2K6uQ4kjxgkGf7uie03ZBjno0JpIpZJ5Ix8VnhagTvAdJTUU-PnEoYJhWM6yHNDkscUsHrvmXxOerB0wgIdyekSIOAmam8R9CN_NhBwFqTse8fURzdGHqDzzg4sZZH5qAKBLFLIUS3K8U13np4U5M1dR2EvzEQmfniCz1ppi3vVEUWpNaQFju6X7L1fOOOgh6_f5UuAt79sDHNqni0UENSJ0quPU0dfvdqvhhBxaJ&src-supplier=Texas+Instruments, ComponentLink3Description=https://sigma.octopart.com:443/179311906/technical_drawing/Texas-Instruments-LMR16006YDDCR.pdf?src-supplier=Texas+Instruments, ComponentLink3URL=https://sigma.octopart.com:443/179311906/technical_drawing/Texas-Instruments-LMR16006YDDCR.pdf?src-supplier=Texas+Instruments, ComponentLink4Description=https://sigma.octopart.com:443/159779760/technical_drawing/Texas-Instruments-LMR16006YDDCR.pdf?src-supplier=Texas+Instruments, ComponentLink4URL=https://sigma.octopart.com:443/159779760/technical_drawing/Texas-Instruments-LMR16006YDDCR.pdf?src-supplier=Texas+Instruments, ComponentLink5Description=https://sigma.octopart.com:443/149167535/technical_drawing/Texas-Instruments-LMR16006YDDCR.pdf?src-supplier=Texas+Instruments, ComponentLink5URL=https://sigma.octopart.com:443/149167535/technical_drawing/Texas-Instruments-LMR16006YDDCR.pdf?src-supplier=Texas+Instruments, ComponentLink6Description=https://datasheet.octopart.com:443/LMR16006YDDCR-Texas-Instruments-datasheet-34207968.pdf?src-supplier=Texas+Instruments, ComponentLink6URL=https://datasheet.octopart.com:443/LMR16006YDDCR-Texas-Instruments-datasheet-34207968.pdf?src-supplier=Texas+Instruments, ComponentLink7Description=https://datasheet.octopart.com:443/LMR16006YDDCR-Texas-Instruments-datasheet-32868826.pdf?src-supplier=Texas+Instruments, ComponentLink7URL=https://datasheet.octopart.com:443/LMR16006YDDCR-Texas-Instruments-datasheet-32868826.pdf?src-supplier=Texas+Instruments, ComponentLink8Description=https://sigma.octopart.com:443/49250152/technical_drawing/Texas-Instruments-LMR16006YDDCR.pdf?src-supplier=Texas+Instruments, ComponentLink8URL=https://sigma.octopart.com:443/49250152/technical_drawing/Texas-Instruments-LMR16006YDDCR.pdf?src-supplier=Texas+Instruments, ComponentLink9Description=https://datasheet.octopart.com:443/LMR16006YDDCR-Texas-Instruments-datasheet-94062126.pdf?src-supplier=Newark, ComponentLink9URL=https://datasheet.octopart.com:443/LMR16006YDDCR-Texas-Instruments-datasheet-94062126.pdf?src-supplier=Newark, ComponentLink10Description=https://datasheet.octopart.com:443/LMR16006YDDCR-Texas-Instruments-datasheet-165804140.pdf?src-supplier=LCSC, ComponentLink10URL=https://datasheet.octopart.com:443/LMR16006YDDCR-Texas-Instruments-datasheet-165804140.pdf?src-supplier=LCSC, ComponentLink11Description=https://datasheet.octopart.com:443/LMR16006YDDCR-Texas-Instruments-datasheet-159115387.pdf?src-supplier=LCSC, ComponentLink11URL=https://datasheet.octopart.com:443/LMR16006YDDCR-Texas-Instruments-datasheet-159115387.pdf?src-supplier=LCSC, ComponentLink12Description=https://datasheet.octopart.com:443/LMR16006YDDCR-Texas-Instruments-datasheet-137316104.pdf?src-supplier=Future+Electronics, ComponentLink12URL=https://datasheet.octopart.com:443/LMR16006YDDCR-Texas-Instruments-datasheet-137316104.pdf?src-supplier=Future+Electronics, ComponentLink13Description=http://sigma.octopart.com:80/reach_statement/Texas-Instruments-company-64.pdf?src-supplier=Compliance+Statements, ComponentLink13URL=http://sigma.octopart.com:80/reach_statement/Texas-Instruments-company-64.pdf?src-supplier=Compliance+Statements, ComponentLink14Description=http://sigma.octopart.com:80/conflict_mineral_statement/Texas-Instruments-company-63.pdf?src-supplier=Compliance+Statements, ComponentLink14URL=http://sigma.octopart.com:80/conflict_mineral_statement/Texas-Instruments-company-63.pdf?src-supplier=Compliance+Statements, Height=1.1mm, Lead Free="Lead Free", Length=2.9mm, Lifecycle Status=Production, Manufacturer Part Number=LMR16006YDDCR, Max Duty Cycle=97%, Min Supply Voltage=4V, Mounting Technology="Surface Mount", Number of Channels=1, Number of Outputs=1, Operating Supply Voltage=60V, Output Configuration=Positive, Output Current=600mA, Output Type=Adjustable, Output Voltage=55V, Pins=6, Pricing="3000=1.73123, 6000=1.69874 (USD)", RoHS=Compliant, Schedule B="8542390000, 8542390000|8542390000|8542390000|8542390000|8542390000", Stock=10598, Supplier=DigiKey, Synchronous Rectifier=No, Thickness=870µm, Topology=Buck, Width=1.6mm
U4: library part CMP-0347-00088-2, "Simple Switcher Step-Up Voltage Regulator, 2.7 to 14 V Input, 1 A, 40 V Max Output, -40 to 125 degC, 5-Pin SOT-23 (DBV), Green (RoHS & no Sb/Br)", JLCPCB Part Number=C165138, Manufacturer="Texas Instruments", Operating Temperature Range="-40 to 125 degC", ComponentLink1Description="Manufacturer URL", ComponentLink1URL=www.ti.com, ComponentLink2Description=Datasheet, ComponentLink2URL=http://www.ti.com/lit/ds/symlink/lmr64010.pdf, ComponentLink3Description="Package Specification", ComponentLink3URL=http://www.ti.com/lit/ml/mpds018j/mpds018j.pdf, DatasheetVersion=SNVS736B, Iout="1 A Max.", Mounting Technology="Surface Mount", PackageDescription="5-Pin Plastic Small Outline, Body 1.6 x 2.9 mm, Pitch 0.95 mm", PackageReference=DBV0005A, PackageVersion=4073253-4/L, Packing="Tape and Reel", PartNumber=LMR64010XMFX/NOPB, Regulated Outputs(#)=1, RoHS=TRUE, Topology=Boost, Vin="2.7 V Min.", Vout="40 V Max."
U5: library part CMP-09083-000109-1, "IC DGT POT 10KOHM 256TAP SOT23-8", Case/Package=SOT-23, Frequency=400kHz, JLCPCB Part Number=C144256, Max Operating Temperature=125°C, Max Supply Current=3uA, Max Supply Voltage=5.5V, Min Operating Temperature=-40°C, Min Supply Voltage=2.7V, Package Quantity=3000, Resistance=10kR, Resistance Tolerance=30%, Temperature Coefficient=45ppm/°C, -3db Bandwidth=1.2MHz, Contact Plating=Gold, Interface=I2C, Lead Free="Contains Lead", Memory Type=Volatile, Mount="Surface Mount", Nominal Supply Current=3uA, Number of Circuits=1, Number of Elements=1, Number of Pins=8, Number of Positions=256, Number of Taps=256, Operating Supply Current=3uA, Operating Supply Voltage=5.5V, Packaging="Tape and Reel", Quiescent Current=3uA, Radiation Hardening=No, REACH SVHC="No SVHC", RoHS Compliant=Yes, Series=-, Supply Current=3uA, Taper=Linear, Tolerance=30%
U6: library part CMP-0272-03257-3, "High-Voltage, High-Current Operational Amplifier, 8 to 60 V, -55 to 125 degC, 8-pin SOIC (D8), Green (RoHS & no Sb/Br)", JLCPCB Part Number=C544592, Manufacturer="Texas Instruments", Rating=Catalog, Total Supply Voltage(Max)(+5V is 5, +/-5V is 10)=60, Total Supply Voltage(Min)(+5V is 5, +/-5V is 10)=8, CMRR(Min)(dB)=92, Code_JEDEC=MS-012, ComponentLink1Description="Manufacturer URL", ComponentLink1URL=http://www.ti.com/, ComponentLink2Description=Datasheet, ComponentLink2URL=http://www.ti.com/lit/ds/symlink/opa551.pdf, ComponentLink3Description="Package Specification", ComponentLink3URL=http://www.ti.com/litv/pdf/msoi002j, DatasheetVersion=SBOS100A, Eco-Plan="Green (RoHS & no Sb/Br)", GBW(Typ)(MHz)=3, IIB(Max)(pA)=100, Iq per channel(Max)(mA)=8.5, Mounting Technology="Surface Mount", Number of Channels=1, Offset Drift(Typ)(uV/C)=7, PackageDescription="8-Pin Plastic Small Outline, Body 4.9 x 3.9 mm, Pitch 1.27 mm", PackageReference=D0008A, PackageVersion="4040047-3/M, 06/2011", Packing="LARGE T&R", PartNumber=OPA551UA/2K5, Slew Rate(Typ)(V/us)=15, Sub Family="High Output Current Amplifier (>=50mA), High Supply Voltage Amplifier (>=30V), Precision Amplifier", Vio (25C)(Max)(mV)=3
U7: library part CMP-0272-03266-3, "High-Voltage, High-Current Operational Amplifier, 8 to 60 V, -55 to 125 degC, 8-pin SOIC (D8), Green (RoHS & no Sb/Br)", JLCPCB Part Number=C2057473, Manufacturer="Texas Instruments", Rating=Catalog, Total Supply Voltage(Max)(+5V is 5, +/-5V is 10)=60, Total Supply Voltage(Min)(+5V is 5, +/-5V is 10)=8, CMRR(Min)(dB)=92, Code_JEDEC=MS-012, ComponentLink1Description="Manufacturer URL", ComponentLink1URL=http://www.ti.com/, ComponentLink2Description=Datasheet, ComponentLink2URL=http://www.ti.com/lit/ds/symlink/opa552.pdf, ComponentLink3Description="Package Specification", ComponentLink3URL=http://www.ti.com/litv/pdf/msoi002j, DatasheetVersion=SBOS100A, Eco-Plan="Green (RoHS & no Sb/Br)", GBW(Typ)(MHz)=12, IIB(Max)(pA)=100, Iq per channel(Max)(mA)=8.5, Mounting Technology="Surface Mount", Number of Channels=1, Offset Drift(Typ)(uV/C)=7, PackageDescription="8-Pin Plastic Small Outline, Body 4.9 x 3.9 mm, Pitch 1.27 mm", PackageReference=D0008A, PackageVersion="4040047-3/M, 06/2011", Packing="LARGE T&R", PartNumber=OPA552UA/2K5, Slew Rate(Typ)(V/us)=24, Sub Family="High Output Current Amplifier (>=50mA), High Supply Voltage Amplifier (>=30V), Precision Amplifier", Vio (25C)(Max)(mV)=3
U8: library part CMP-0004-00132-1, "16-Bit, Ultra-Low Power, Voltage Output Digital to Analog Converter, -40 to 85 degC, 8-pin SOIC (D8), Green (RoHS & no Sb/Br)", JLCPCB Part Number=C527455, Manufacturer="Texas Instruments", Power Consumption(Typ)(mW)=0.015, Code_JEDEC=MS-012, ComponentLink1Description="Manufacturer URL", ComponentLink1URL=http://www.ti.com/, ComponentLink2Description=Datasheet, ComponentLink2URL=http://www.ti.com/general/docs/lit/getliterature.tsp?genericPartNumber=DAC8830&fileType=pdf, ComponentLink3Description="Package Specification", ComponentLink3URL=http://www.ti.com/litv/pdf/msoi002j, DAC Channels=1, DatasheetVersion=SLAS449D, DNL(Max)(+/-LSB)=1, Eco-Plan="Green (RoHS & no Sb/Br)", INL(Max)(+/-LSB)=1, Interface="Serial SPI", Mounting Technology="Surface Mount", PackageDescription="8-Pin Plastic Small Outline, Body 4.9 x 3.9 mm, Pitch 1.27 mm", PackageReference=D8, PackageVersion="4040047-3/M, 06/2011", PartNumber=DAC8830ICDR, Resolution(Bits)=16, Settling Time(us)=1, SubFamily="Precision DAC (=<10MSPS)"
U9: library part CMP-0272-01739-3, "20 MHz, Low Noise, RRIO, CMOS Operational Amplifier, 1.8 to 5.5 V, -40 to 125 degC, 14-pin SOP (PW14), Green (RoHS & no Sb/Br)", JLCPCB Part Number=C486027, Manufacturer="Texas Instruments", Rating=Catalog, Total Supply Voltage(Max)(+5V is 5, +/-5V is 10)=5.5, Total Supply Voltage(Min)(+5V is 5, +/-5V is 10)=1.8, CMRR(Min)(dB)=90, Code_JEDEC=MO-153, ComponentLink1Description="Manufacturer URL", ComponentLink1URL=http://www.ti.com/, ComponentLink2Description=Datasheet, ComponentLink2URL=http://www.ti.com/lit/ds/symlink/opa4322.pdf, ComponentLink3Description="Package Specification", ComponentLink3URL=http://www.ti.com/litv/pdf/mpds360, DatasheetVersion=SBOS538E, Eco-Plan="Green (RoHS & no Sb/Br)", GBW(Typ)(MHz)=20, IIB(Max)(pA)=10, Iq per channel(Max)(mA)=1.65, Mounting Technology="Surface Mount", Number of Channels=4, Offset Drift(Typ)(uV/C)=1.8, PackageDescription="14-Pin Plastic Small Outline, Body 5 x 4.4 mm, Pitch 0.65 mm", PackageReference=PW0014A, PackageVersion="4040064-3/G, 02/2011", Packing="LARGE T&R", PartNumber=OPA4322AIPWR, Slew Rate(Typ)(V/us)=10, Sub Family="High Output Current Amplifier (>=50mA), Low Input Bias Current Amp (<=10pA), Low Noise Amp (<=10nV/rtHz), Low Supply Voltage Amplifier (<=2.7V), Precision Amplifier", Vio (25C)(Max)(mV)=2

## Via types
v1: diameter 0.6, hole 0.3, Top Layer to Bottom Layer, tented both sides, 79 vias
v2: diameter 4, hole 2.2, Top Layer to Bottom Layer, 3 vias

## Nets (pads, with @x,y where several pads share a name; then routed paths per layer and width w, separated by ;. In a path a pad name is that pad's centre, name@x,y a point inside that pad or via, vN(x,y) a via of type N, cw(c..) or ccw(c..) an arc to the next point about the centre after c; other vN are vias at no path point)
3V3_LDO: R1.1 U2.3 | length 1.6
  Top Layer w0.5: R1.1 U2.3
+3V3: C2.1 C10.2 C15.1 C37.2 C38.1 P1.2 R1.2 R7.2 R8.2 R12.1 R18.2 TP2.1 U1.3 U1.4 U5.2 U8.8 | length 60.4
  Top Layer w0.2: P1.2@27.766,54.76 R12.1@30.707,54.76 ; U1.3 U1.4@59.699,8.524
  Top Layer w0.3: 44.25,24.447 44.25,30.785
  Top Layer w0.5: R1.2 27.407,57.379 ; v1(27.561,53.645) P1.2@27.561,54.76 ; P1.2 27.407,55.12 27.407,57.379 ; TP2.1 30.582,58.42 29.54,57.379 C10.2 27.407,57.379 ; C15.1@35.79,26.797 35.713,26.719 35.713,26.319 35.595,26.201 35.595,25.1 36.275,24.42 44.223,24.42 ; C15.1@35.8,26.788 37.48,26.788 U5.2@37.494,26.802 ; R7.2@43.744,30.785 44.25,30.785 R8.2@44.757,30.785 ; 44.25,24.447 44.223,24.42 ; v1(48.539,23.673) 48.537,23.675 48.537,24.545 C37.2 ; U8.8 51.128,24.686 50.862,24.42 49.684,24.42 48.338,24.42 44.223,24.42 ; v1(54.661,30.277) R18.2@55.384,30.277 ; C2.1 59.427,8.442 59.508,8.524 59.699,8.524 U1.4 ; C2.1@59.554,6.782 59.58,6.756 60.276,6.756 v1(60.301,6.731)
  Bottom Layer w0.5: v1(48.539,23.673) 53.772,23.673 54.661,24.562 v1(54.661,30.277)
AMP_A: C18.1 R9.2 R13.1 R15.2 | length 30.6
  Top Layer w0.5: C18.1 10.363,22.348 12.396,20.315 12.882,20.315 R9.2 R9.2 13.006,19.407 v1(13.005,19.406) ; R15.2 25.194,13.643 27.171,15.62 v1(27.171,18.854) 27.144,18.854 27.124,18.873 26.338,18.873 26.213,18.998 R13.1
  Bottom Layer w0.5: v1(13.005,19.406) 16.967,19.406 20.228,16.145 24.463,16.145 v1(27.171,18.854)
AMP_A_OUT: C19.2 R9.1 U6.6 | length 20.3
  Top Layer w0.5: v1(12.979,22.377) 12.993,22.364 12.993,21.604 R9.1 ; v1(16.764,21.133) 16.9,21.268 17.231,21.268 17.451,21.488 U6.6 ; C19.2 26.922,20.218 26.973,20.168 v1(27,20.168)
  Bottom Layer w0.5: v1(12.979,22.377) 14.224,21.133 v1(16.764,21.133) 20.752,17.145 23.978,17.145 v1(27,20.168)
AMP_B: C25.1 R14.1 R16.2 R19.2 | length 30.7
  Top Layer w0.5: C25.1 10.366,8.558 R16.2@12.524,8.558 ; R16.2@12.651,8.558 13.005,8.558 R16.2@13.007,8.557 ; R16.2@12.801,8.534 v1(13.665,8.534) ; R16.2@12.804,8.557 R16.2@12.826,8.534 ; R14.1 25.018,15.671 v1(25.019,14.884) v1(25.019,14.884) ; R19.2 26.366,6.608 26.366,6.594 27.18,6.594 v1(27.199,6.574)
  Bottom Layer w0.5: v1@13.767,8.534 13.786,8.515 16.885,8.515 20.396,5.004 25.629,5.004 v1(27.199,6.574) 28.078,7.453 28.078,8.765 25.019,11.825 v1(25.019,14.884)
AMP_B_OUT: C26.2 R16.1 U7.6 | length 19.9
  Top Layer w0.5: R16.1@12.602,9.971 12.655,10.024 12.655,10.725 v1(12.675,10.744) ; v1(16.789,10.058) 16.822,10.091 16.862,10.091 16.889,10.118 17.249,10.118 17.469,10.338 U7.6 ; C26.2 27.014,7.874 v1(27.028,7.888)
  Bottom Layer w0.5: v1(12.675,10.744) 13.36,10.058 v1(16.789,10.058) 20.803,6.045 25.185,6.045 v1@27.022,7.881
Boost_FB: C3.1 R3.1 R4.2 U4.3 | length 4.9
  Top Layer w0.2: R3.1@42.088,53.024 42.088,54.862 U4.3 ; R3.1 C3.1 ; C3.1@43.257,53.024 43.332,52.949 44.219,52.949 44.781,52.386 R4.2@44.831,52.386
Boost_SW: D1.2 L2.2 U4.1 | length 5.9
  Top Layer w0.5: D1.2@40.856,57.785 41.7,56.941 42.167,56.941 U4.1 ; D1.2 40.856,61.036 L2.2
BUF_IN: C42.2 R20.2 U9.3 | length 2.7
  Top Layer w0.2: U9.3 45.467,13.396 C42.2 45.692,13.143 R20.2
BUF_OUT: R26.1 TP10.1 U9.1 U9.2 | length 12.7
  Top Layer w0.2: U9.2 U9.1 44.35,12.096 44.475,11.971 v1(44.475,11.455) ; v1(44.933,18.364) 45.718,18.364 R26.1 ; R26.1 TP10.1
  Bottom Layer w0.2: v1(44.475,11.455) 44.475,11.564 45.999,13.088 45.999,17.297 v1(44.933,18.364)
DAC_OUT: R20.1 TP7.1 U8.1 | length 6.7
  Top Layer w0.2: TP7.1 R20.1 ; TP7.1@47.258,5.664 TP7.1@47.346,5.664